# EAGLE board main_Dio Faziko Pratama(Line Follower) (EAGLE 9.6.2)
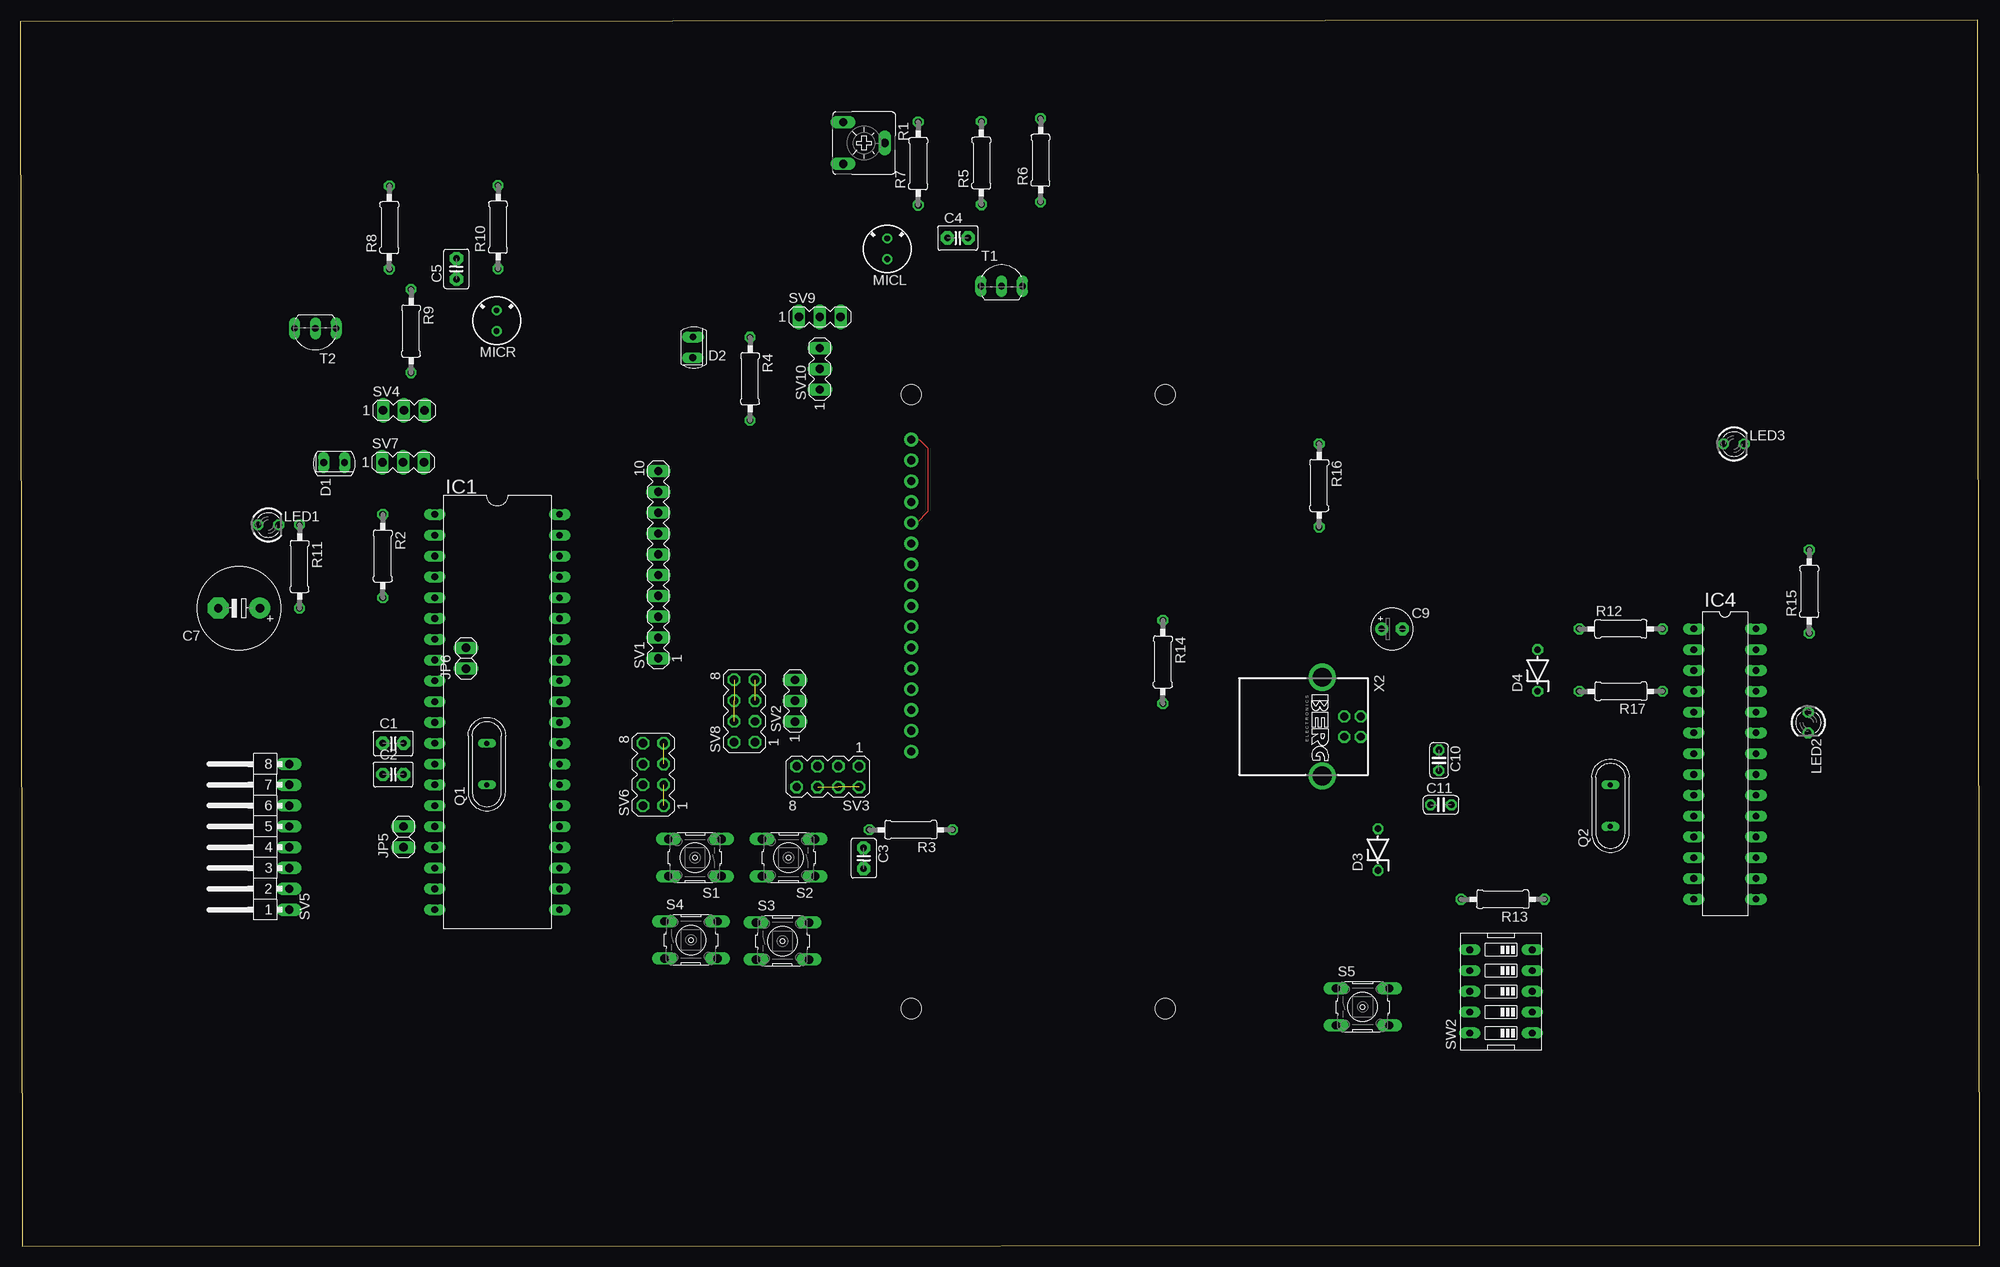
[diagram p0: board, top side]
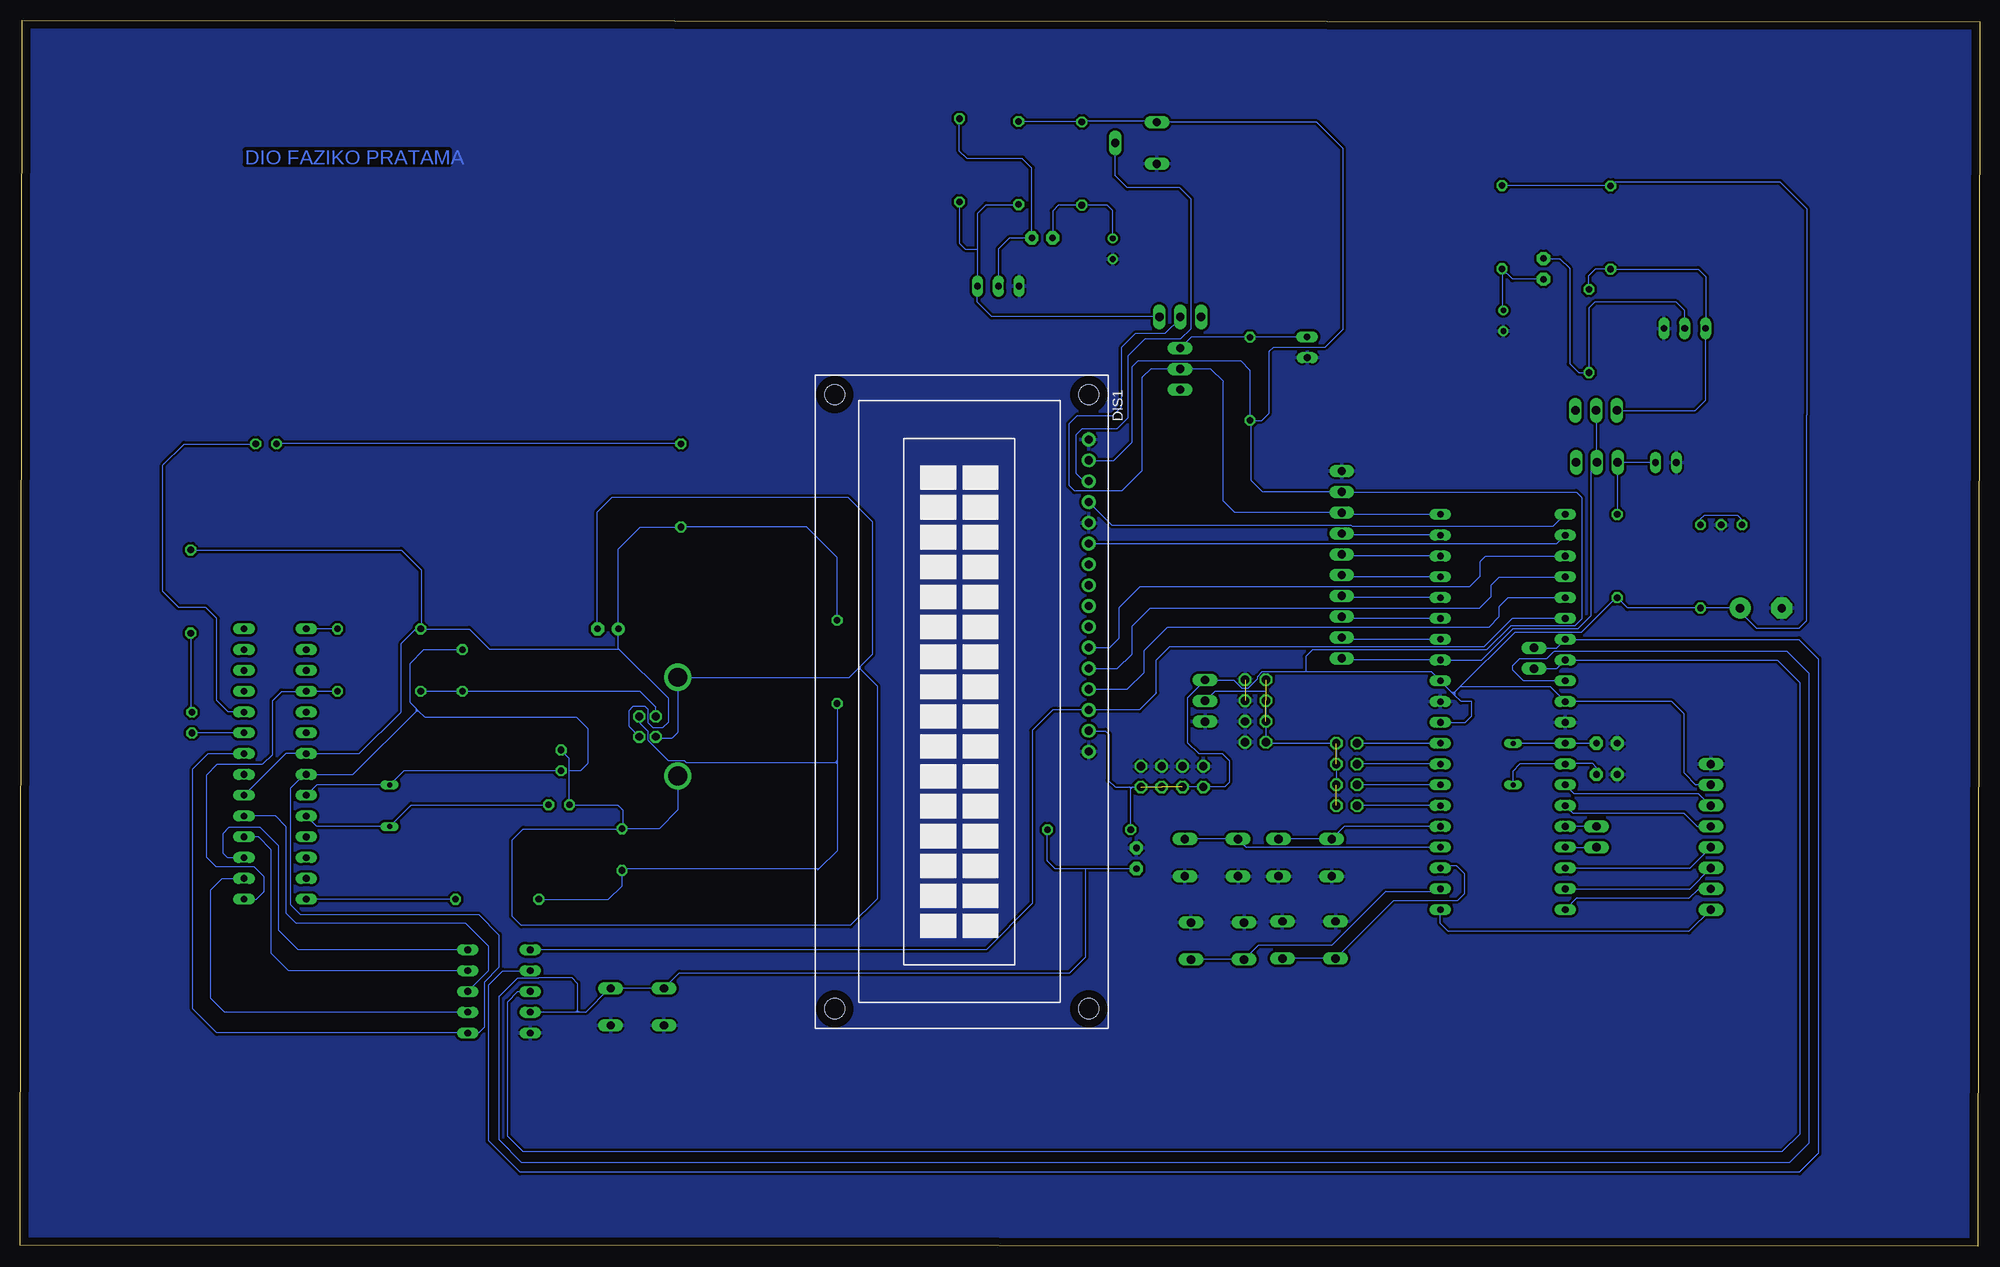
[diagram p1: board, bottom side, seen from below]

Size 239.14 x 149.71 mm. Coordinates in mm from the lower left corner, seen from the top.
Outline: 0.25,0 239.14,0.15 238.89,149.72 0,149.56 0.25,0
Copper layers (1*16): Top 0.035mm / dielectric 1.5mm / Bottom 0.035mm
Design rules "default": minimum track width 6mil, minimum drill 0.35mm, track to track 6mil, track to pad 6mil, pad to pad 6mil, via to via 6mil, smd to smd 6mil, copper to edge 40mil, drill to drill 6mil, minimum pad ring 10mil, minimum via ring 8mil, stop-mask expansion 4mil, vias tented up to drill 0mil, thermal gap 10mil

## Footprints (pad centres in the part's own frame; a part is rotated, then mirrored left to right if it is on the bottom)
C2.5-3 = drill 0.813 pad 1.6 octagon: 1 -1.27,0; 2 1.27,0
E5-10,5 = drill 1.016 pad 2.54: + -2.54,0 | drill 1.016 pad 2.54 octagon: - 2.54,0
E2,5-5 = drill 0.813 pad 1.6: + -1.27,0 | drill 0.813 pad 1.6 octagon: - 1.27,0
C025-024X044 = drill 0.813 octagon: 1 -1.27,0; 2 1.27,0
SFH225 = drill 0.813 long: A 0,1.27; K 0,-1.27
ZDIO-5 = drill 0.813 octagon: A 2.54,0; C -2.54,0
TUXGR_16X2_R2 = drill 1 pad 1.676: 1 -32,15.5; 2 -29.46,15.5; 3 -26.92,15.5; 4 -24.38,15.5; 5 -21.84,15.5; 6 -19.3,15.5; 7 -16.76,15.5; 8 -14.22,15.5; 9 -11.68,15.5; 10 -9.14,15.5; 11 -6.6,15.5; 12 -4.06,15.5; 13 -1.52,15.5; 14 1.02,15.5; 15 3.56,15.5; 16 6.1,15.5 | hole 2.5: -37.5,-15.5; 37.5,-15.5; -37.5,15.5; 37.5,15.5
DIL40 = drill 0.813 long: 1 -24.13,-7.62; 2 -21.59,-7.62; 3 -19.05,-7.62; 4 -16.51,-7.62; 5 -13.97,-7.62; 6 -11.43,-7.62; 7 -8.89,-7.62; 8 -6.35,-7.62; 9 -3.81,-7.62; 10 -1.27,-7.62; 11 1.27,-7.62; 12 3.81,-7.62; 13 6.35,-7.62; 14 8.89,-7.62; 15 11.43,-7.62; 16 13.97,-7.62; 17 16.51,-7.62; 18 19.05,-7.62; 19 21.59,-7.62; 20 24.13,-7.62; 21 24.13,7.62; 22 21.59,7.62; 23 19.05,7.62; 24 16.51,7.62; 25 13.97,7.62; 26 11.43,7.62; 27 8.89,7.62; 28 6.35,7.62; 29 3.81,7.62; 30 1.27,7.62; 31 -1.27,7.62; 32 -3.81,7.62; 33 -6.35,7.62; 34 -8.89,7.62; 35 -11.43,7.62; 36 -13.97,7.62; 37 -16.51,7.62; 38 -19.05,7.62; 39 -21.59,7.62; 40 -24.13,7.62
DIL28-3 = drill 0.813 long: 1 -16.51,-3.81; 2 -13.97,-3.81; 3 -11.43,-3.81; 4 -8.89,-3.81; 5 -6.35,-3.81; 6 -3.81,-3.81; 7 -1.27,-3.81; 8 1.27,-3.81; 9 3.81,-3.81; 10 6.35,-3.81; 11 8.89,-3.81; 12 11.43,-3.81; 13 13.97,-3.81; 14 16.51,-3.81; 15 16.51,3.81; 16 13.97,3.81; 17 11.43,3.81; 18 8.89,3.81; 19 6.35,3.81; 20 3.81,3.81; 21 1.27,3.81; 22 -1.27,3.81; 23 -3.81,3.81; 24 -6.35,3.81; 25 -8.89,3.81; 26 -11.43,3.81; 27 -13.97,3.81; 28 -16.51,3.81
1X02 = drill 1.016 long: 1 -1.27,0; 2 1.27,0
LED3MM = drill 0.813 octagon: A -1.27,0; K 1.27,0
F6050AP = drill 0.7 pad 1.2: 1 0,1.27; 2 0,-1.27
QS = drill 0.61 long: 1 -2.54,0; 2 2.54,0
CA6V = drill 1.016 long: A -2.54,-2.54; E 2.54,-2.54; S 0,2.54
0207/10 = drill 0.813 octagon: 1 -5.08,0; 2 5.08,0
B3F-10XX = drill 1.016 long: 1 -3.251,2.261; 2 3.251,2.261; 3 -3.251,-2.261; 4 3.251,-2.261
MA10-1 = drill 1.016 long: 1 -11.43,0; 2 -8.89,0; 3 -6.35,0; 4 -3.81,0; 5 -1.27,0; 6 1.27,0; 7 3.81,0; 8 6.35,0; 9 8.89,0; 10 11.43,0
MA03-1 = drill 1.016 long: 1 -2.54,0; 2 0,0; 3 2.54,0
MA04-2 = drill 1.016 octagon: 1 -3.81,-1.27; 2 -3.81,1.27; 3 -1.27,-1.27; 4 -1.27,1.27; 5 1.27,-1.27; 6 1.27,1.27; 7 3.81,-1.27; 8 3.81,1.27
MA08-1W = drill 1.016 long: 1 -8.89,0; 2 -6.35,0; 3 -3.81,0; 4 -1.27,0; 5 1.27,0; 6 3.81,0; 7 6.35,0; 8 8.89,0
EDG-05 = drill 0.813 long: 1 -5.08,-3.81; 2 -2.54,-3.81; 3 0,-3.81; 4 2.54,-3.81; 5 5.08,-3.81; 6 5.08,3.81; 7 2.54,3.81; 8 0,3.81; 9 -2.54,3.81; 10 -5.08,3.81
TO92-EBC = drill 0.813 long: B 0,-1.27; C 2.54,-1.27; E -2.54,-1.27
PN61729-S = drill 0.95 octagon: 1 1.25,4.71; 2 -1.25,4.71; 3 -1.25,2.71; 4 1.25,2.71 | drill 2.3 pad 2.9: S1 -6.02,0; S2 6.02,0

## Placement (x,y rotation side)
C1  22p  [C2.5-3]  45.5,61.45 0 top
C2  22p  [C2.5-3]  45.5,57.64 0 top
C3  10nF  [C2.5-3]  102.92,47.41 270 top
C4  100nF  [C2.5-3]  114.41,123.16 0 top
C5  100nF  [C2.5-3]  53.22,119.38 90 top
C7  1000uF/16V  [E5-10,5]  26.68,77.95 180 top
C9  10uF/16V  [E2,5-5]  167.42,75.42 0 top
C10  22pF  [C025-024X044]  173.15,59.36 270 top
C11  22pF  [C025-024X044]  173.4,53.93 0 top
D1  SFH225  [SFH225]  38.29,95.72 270 top
D2  SFH225  [SFH225]  82.07,109.81 359.9 top
D3  DZ3,6V  [ZDIO-5]  165.71,48.46 90 top
D4  DZ3,6V  [ZDIO-5]  185.2,70.34 90 top
DIS1  TUXGR_16X2_R2  [TUXGR_16X2_R2]  124.24,66.53 270 bottom
IC1  MEGA16-P  [DIL40]  58.2,65.26 270 top
IC4  MEGA8-P  [DIL28-3]  208.06,58.91 270 top
JP5  [1X02]  46.77,50.02 90 top
JP6  [1X02]  54.37,71.84 90 top
LED1  merah  [LED3MM]  30.26,88.12 0 top
LED2  Merah  [LED3MM]  218.22,63.97 270 top
LED3  hijau  [LED3MM]  209.15,98.01 0 top
MICL  MC  [F6050AP]  105.79,121.83 180 top
MICR  MC  [F6050AP]  58.12,113.05 180 top
Q1  8MHz  [QS]  56.93,58.91 90 top
Q2  12MHz  [QS]  194.09,53.83 90 top
R1  20K  [CA6V]  102.97,134.75 270 top
R2  56K  [0207/10]  44.23,84.31 270 top
R3  10K  [0207/10]  108.69,50.9 180 top
R4  56K  [0207/10]  89.06,105.96 270 top
R5  10K  [0207/10]  117.29,132.31 90 top
R6  100K  [0207/10]  124.52,132.64 90 top
R7  10K  [0207/10]  109.58,132.24 90 top
R8  10K  [0207/10]  45.03,124.44 90 top
R9  100K  [0207/10]  47.67,111.79 270 top
R10  10K  [0207/10]  58.29,124.48 90 top
R11  330  [0207/10]  34.07,83.04 270 top
R12  10K  [0207/10]  195.36,75.42 0 top
R13  68  [0207/10]  180.95,42.4 180 top
R14  2K2  [0207/10]  139.45,71.38 270 top
R15  330  [0207/10]  218.36,79.98 90 top
R16  330  [0207/10]  158.53,92.94 270 top
R17  68  [0207/10]  195.36,67.8 180 top
S1  [B3F-10XX]  82.33,47.48 180 top
S2  [B3F-10XX]  93.76,47.48 180 top
S3  [B3F-10XX]  93.02,37.3 0 top
S4  [B3F-10XX]  81.85,37.43 0 top
S5  [B3F-10XX]  163.84,29.25 0 top
SV1  [MA10-1]  77.85,83.26 90 top
SV2  [MA03-1]  94.53,66.63 90 top
SV3  [MA04-2]  98.56,57.38 180 top
SV4  [MA03-1]  46.8,102.1 0 top
SV5  [MA08-1W]  32.8,50.02 90 top
SV6  [MA04-2]  77.25,57.64 90 top
SV7  [MA03-1]  46.71,95.76 0 top
SV8  [MA04-2]  88.39,65.39 90 top
SV9  [MA03-1]  97.57,113.52 0 top
SV10  [MA03-1]  97.57,107.17 90 top
SW2  [EDG-05]  180.72,31.14 90 top
T1  [TO92-EBC]  119.77,118.54 0 top
T2  [TO92-EBC]  35.99,110.84 180 top
X2  PN61729-S  [PN61729-S]  158.89,63.49 270 top

## Library data of the parts
C1-C5 = capacitor-wima
C7 C9-C11 R2-R11 = rcl
D1 D2 = opto-trans-siemens; OC_FARNELL: unknown; OC_NEWARK: unknown
D3 D4 = diode
DIS1 = display-lcd; OC_FARNELL: unknown; OC_NEWARK: unknown
IC1 = atmel; MPN: ATMEGA16-16PU; OC_FARNELL: 9171142; OC_NEWARK: 01M6885
IC4 = atmel
JP5 JP6 = pinhead
LED1-LED3 = led
MICL MICR = microphon
Q1 Q2 SW2 = special
R1 = pot
R12-R17 = resistor
S1-S5 = switch-omron; MPN: B3F-1000; OC_FARNELL: 176432; OC_NEWARK: 36M3542
SV1-SV10 = con-lstb; OC_FARNELL: unknown; OC_NEWARK: unknown
T1 T2 = transistor
X2 = con-berg

## Nets
DGND: C9.- C10.1 C11.1 D3.A D4.A IC4.8 IC4.22 SW2.1 X2.4 X2.S1 X2.S2
GND: C1.1 C2.1 C3.1 C7.- D1.K D2.K DIS1.1 DIS1.5 DIS1.16 IC1.11 IC1.31 LED1.K MICL.1 MICR.1 R1.E S1.1 S1.2 S2.1 S2.2 S3.1 S3.2 S4.1 S4.2 S5.3 S5.4 SV1.10 SV2.1 SV3.1 SV3.3 SV3.5 SV3.7 SV5.8 SV8.1 SV8.3 SV8.5 SV8.7 SW2.10 T1.E T2.E
MISO: IC1.7 JP6.2 SW2.7
MOSI: DIS1.14 IC1.6 SW2.6
N$1: IC1.33 SV1.1 SV4.2 SV7.2
N$2: IC1.34 SV1.2
N$3: IC1.35 SV1.3
N$4: IC1.36 SV1.4
N$5: IC1.37 SV1.5
N$6: IC1.38 SV1.6
N$7: IC1.39 SV1.7
N$8: D2.A R4.1 SV10.3
N$9: IC1.24 S2.3 S2.4
N$10: DIS1.13 IC1.5
N$11: DIS1.12 IC1.4
N$12: DIS1.11 IC1.3
N$13: DIS1.6 IC1.2
N$14: R5.1 R6.1 SV9.3 T1.C
N$15: DIS1.3 R1.S
N$16: C1.2 IC1.12 Q1.2
N$17: C2.2 IC1.13 Q1.1
N$18: DIS1.4 IC1.1
N$19: D1.A R2.1 SV7.1
N$20: IC1.23 S4.3 S4.4
N$21: IC1.40 SV1.8 SV9.2 SV10.2
N$22: C4.2 R6.2 T1.B
N$23: C4.1 MICL.2 R7.1
N$24: R8.1 R9.1 SV4.1 T2.C
N$25: C5.2 R9.2 T2.B
N$26: C5.1 MICR.2 R10.1
N$27: IC1.22 S3.3 S3.4
N$28: IC1.25 S1.3 S1.4
N$30: IC1.21 SV5.1
N$32: IC1.20 SV5.2
N$33: IC1.19 SV5.3
N$34: IC1.18 SV5.4
N$35: IC1.15 SV5.5
N$36: IC1.14 SV5.6
N$37: IC1.16 JP5.2
N$38: IC1.17 JP5.1
N$41: LED1.A R11.1
N$42: IC4.1 R12.2
N$44: IC1.26 SV6.2
N$45: IC1.27 SV6.4
N$46: IC1.28 SV6.6
N$47: IC1.29 SV6.8
N$51: C10.2 IC4.9 Q2.2
N$52: C11.2 IC4.10 Q2.1
N$53: IC4.14 R13.1
N$55: LED2.A R15.1
N$56: LED3.A R16.1
N$57: IC4.23 LED2.K
N$58: IC4.24 LED3.K
N$59: D4.C R17.2 X2.3
N$67: IC4.4 IC4.15 R17.1
N$69: D3.C R13.2 R14.2 X2.2
N$175: IC4.17 SW2.5
N$176: IC4.18 SW2.4
N$177: IC4.19 SW2.3
N$178: IC4.16 SW2.2
RESET: C3.2 IC1.9 R3.1 S5.1 S5.2 SW2.9
SCK: IC1.8 JP6.1 SW2.8
VCC: C7.+ DIS1.2 DIS1.15 IC1.10 IC1.30 IC1.32 R1.A R2.2 R3.2 R4.2 R5.2 R7.2 R8.2 R10.2 R11.2 SV1.9 SV2.3 SV3.2 SV3.4 SV3.6 SV3.8 SV5.7
VDD: SV2.2 SV6.1 SV6.3 SV6.5 SV6.7 SV8.2 SV8.4 SV8.6 SV8.8
VPP: C9.+ IC4.7 IC4.20 R12.1 R14.1 R15.2 R16.2 X2.1

## Tracks (layer width: path | path; a pad name or v marks a point on that pad's centre or on a via)
DGND
  Bottom 0.152: IC4.22 211.89,60.2 216.19,60.2 218.09,58.3 218.09,29.01 215.15,26.06 SW2.1 183.21,26.06 182.53,26.74 182.53,32.28 180.73,34.08 180.73,38.06 183.21,40.55 204.96,40.55 206.21,41.79 206.21,55.91 204.47,57.64 IC4.8 198.57,57.64 190.85,65.36 | 137.01,70.47 136.8,70.69 | 136.8,70.69 136.58,70.9 | 136.58,70.9 135.11,72.38 135.11,88.45 138.09,91.43 166.93,91.43 168.77,89.59 168.77,75.51 C9.- | 190.51,65.36 189.75,64.6 171.23,64.6 169.88,63.26 169.88,59.01 170.8,58.09 172.13,58.09 | 190.51,65.36 190.68,65.53 | 190.68,65.53 190.85,65.7 | 190.85,65.7 191.58,66.43 191.58,71.19 189.89,72.88 D4.A | X2.S2 158.89,53.3 161.19,51 D3.A | X2.4 161.42,62.05 159.62,62.05 158.89,62.77 X2.S1 137.98,69.51 137.06,70.43 137.01,70.47 | 136.8,70.69 136.58,70.47 | 136.58,70.47 134.55,68.44 134.55,42.47 137.83,39.19 177.99,39.19 179.12,40.31 179.12,49.62 177.74,51 D3.A | D3.A 165.6,51.11 165.6,53.3 166.23,53.93 C11.1 172.13,58.09 | 172.13,58.09 172.13,59.61 C10.1 | 190.85,65.36 190.68,65.53 | 190.51,65.36 190.85,65.36 | 190.85,65.36 190.85,65.7 | 136.58,70.47 136.58,70.9 | 136.58,70.47 137.01,70.47
GND  (1 unrouted)
  Top 0.152: DIS1.1 109.73,98.53 110.78,97.48 110.78,89.72 109.43,88.37 DIS1.5
  pour Bottom (isolate 0.305): -0.02,149.95 -0.02,0.39 239.17,0.39 239.17,149.95
MISO
  Bottom 0.152: JP6.2 51.62,73.11 IC1.7 22.05,74.15 19.66,71.76 19.66,11.37 21.99,9.04 178.14,9.04 181.98,12.88 181.98,31.96 180.25,33.68 SW2.7
MOSI
  Bottom 0.152: IC1.6 57.05,76.69 60.52,73.22 98.89,73.22 100.47,71.65 100.47,67.59 102.55,65.51 DIS1.14 113.13,65.51 115.63,63.01 115.63,41.87 121.28,36.22 SW2.6
N$1
  Bottom 0.152: SV1.1 77.64,71.61 IC1.33 60.77,71.61 56.94,75.44 48.99,75.44 47.4,77.03 47.4,95.08 SV7.2 46.71,102.02 SV4.2
N$2
  Bottom 0.152: IC1.34 77.64,74.15 SV1.2
N$3
  Bottom 0.152: IC1.35 77.64,76.69 SV1.3
N$4
  Bottom 0.152: IC1.36 77.64,79.23 SV1.4
N$5
  Bottom 0.152: IC1.37 77.64,81.77 SV1.5
N$6
  Bottom 0.152: IC1.38 77.64,84.31 SV1.6
N$7
  Bottom 0.152: IC1.39 77.64,86.85 SV1.7
N$8
  Bottom 0.152: D2.A 89.02,111.08 R4.1 96.24,111.04 SV10.3
N$9
  Bottom 0.152: IC1.24 89.52,48.75 S2.4 S2.3
N$10
  Bottom 0.152: DIS1.13 104.02,68.05 101.99,70.09 101.99,72.78 99.1,75.68 59.84,75.68 58.61,76.91 58.61,78.15 57.53,79.23 IC1.5
N$11
  Bottom 0.152: DIS1.12 105.24,70.59 103.45,72.38 103.45,75.75 101.22,77.98 61.01,77.98 59.61,79.38 59.61,80.8 58.63,81.77 IC1.4
N$12
  Bottom 0.152: DIS1.11 106.17,73.13 105,74.3 105,78.05 102.45,80.6 62.23,80.6 60.93,81.9 | 61.13,81.69 60.93,81.89 60.93,81.9 | 60.93,81.9 60.93,83.63 60.25,84.31 IC1.3
N$13
  Bottom 0.152: DIS1.6 51.6,85.83 IC1.2
N$14
  Bottom 0.152: SV9.3 120.55,113.52 122.35,115.32 122.35,117.23 T1.C 122.31,121.81 | 122.31,121.81 122.31,126.18 121.25,127.23 R5.1 | R5.1 | R6.1 124.52,122.54 123.78,121.81 122.31,121.81
N$15
  Bottom 0.152: DIS1.3 109.33,93.45 110.24,94.36 110.24,99.16 110.1,99.3 110.01,99.39 109.52,99.88 105.24,99.88 103.91,101.21 103.91,108.79 101.85,110.85 97.5,110.85 96.25,112.1 96.25,127.92 97.6,129.27 104.03,129.27 105.51,130.75 R1.S
N$16
  Bottom 0.152: IC1.12 50.77,61.45 | C1.2 IC1.12 | IC1.12 Q1.2
N$17
  Bottom 0.152: Q1.1 56.97,56.41 56.97,58.04 56.1,58.91 IC1.13 50.53,58.96 47.24,58.96 46.77,58.49 C2.2
N$18
  Bottom 0.152: IC1.1 52.08,87.89 76.51,87.89 76.68,88.06 105.88,88.06 DIS1.4
N$19
  Bottom 0.152: D1.A 44.13,95.72 SV7.1 44.23,95.71 R2.1
N$20
  Bottom 0.152: IC1.23 65.57,46.46 63.79,46.46 62.86,45.52 62.86,43.14 63.72,42.28 71.49,42.28 S4.3 S4.4
N$21
  Bottom 0.152: IC1.40 77.64,89.39 SV1.8 90.91,89.61 92.31,91 92.31,105.55 92.26,105.6 93.83,107.17 SV10.2 101.15,107.17 102.24,106.08 102.24,94.7 104.72,92.22 110.46,92.22 111.13,92.9 111.13,99.98 111.13,100.13 111.13,100.48 110.13,101.48 105.79,101.48 104.7,102.56 104.7,109.81 103,111.52 99.37,111.52 97.57,113.32 SV9.2
N$22
  Bottom 0.152: T1.B 119.78,117.28 119.78,121.79 118.41,123.16 C4.2 115.68,131.68 116.85,132.85 123.59,132.85 124.52,133.77 R6.2
N$23
  Bottom 0.152: MICL.2 105.79,126.48 106.49,127.18 109.57,127.18 R7.1 112.44,127.16 113.16,126.45 113.16,123.17 C4.1
N$24
  Bottom 0.152: SV4.1 34.69,102.1 33.45,103.34 T2.C 33.41,112.15 33.41,118.43 34.34,119.36 R8.1 46.89,119.36 47.79,118.46 47.79,116.99 R9.1
N$25
  Bottom 0.152: T2.B 35.99,113.86 | 36.02,113.88 35.99,113.86 | C5.2 51.24,120.65 50.03,119.44 50.03,107.8 48.94,106.71 R9.2 47.68,106.72 47.68,114.6 46.96,115.32 37.02,115.32 35.99,114.28 35.99,113.86
N$26
  Bottom 0.152: C5.1 57,118.11 R10.1 58.28,119.39 58.28,114.48 MICR.2
N$27
  Bottom 0.152: IC1.22 66.14,43.35 72.48,43.35 79.02,36.81 88,36.81 S3.3 S3.4
N$28
  Bottom 0.152: IC1.25 77.53,51.29 S1.4 S1.3
N$30
  Bottom 0.152: SV5.1 35.47,38.46 64.85,38.46 65.82,39.43 IC1.21
N$32
  Bottom 0.152: SV5.2 34.3,43.67 35.42,42.55 49.16,42.55 IC1.20
N$33
  Bottom 0.152: IC1.19 35.34,43.67 SV5.3
N$34
  Bottom 0.152: IC1.18 35.34,46.21 SV5.4
N$35
  Bottom 0.152: IC1.15 49.68,52.93 36.09,52.93 34.45,51.29 SV5.5
N$36
  Bottom 0.152: IC1.14 49.55,55.35 34.31,55.35 SV5.6
N$37
  Bottom 0.152: JP5.2 IC1.16
N$38
  Bottom 0.152: IC1.17 JP5.1
N$41
  Bottom 0.152: LED1.A 28.99,88.69 29.54,89.24 33.63,89.24 34.13,88.74 34.13,88.18 R11.1
N$42
  Bottom 0.152: R12.2 IC4.1
N$44
  Bottom 0.152: IC1.26 SV6.2
N$45
  Bottom 0.152: IC1.27 SV6.4
N$46
  Bottom 0.152: IC1.28 SV6.6
N$47
  Bottom 0.152: IC1.29 SV6.8
N$51
  Bottom 0.152: C10.2 192.37,58.09 Q2.2 202.98,56.37 IC4.9
N$52
  Bottom 0.152: IC4.10 202.98,51.29 Q2.1 191.45,53.93 C11.2
N$53
  Bottom 0.152: R13.1 IC4.14
N$55
  Bottom 0.152: R15.1 218.36,65.38 LED2.A
N$56
  Bottom 0.152: R16.1 207.87,98.02 LED3.A
N$57
  Bottom 0.152: IC4.23 218.2,62.72 LED2.K
N$58
  Bottom 0.152: IC4.24 213.76,65.26 215.16,66.66 215.16,76.67 216.53,78.04 219.82,78.04 221.75,79.97 221.75,95.41 219.15,98.01 LED3.K
N$59
  Bottom 0.152: X2.3 161.6,65.91 163.5,67.8 D4.C R17.2
N$67
  Bottom 0.152: IC4.15 210.35,42.4 209.4,43.35 209.4,45.12 210.6,46.32 215.22,46.32 216.43,47.53 216.43,57.61 215.13,58.9 209.54,58.9 208.36,60.08 208.36,66.69 207.25,67.8 204.5,67.8 IC4.4 R17.1
N$69
  Bottom 0.152: R13.2 167.36,42.4 165.71,44.05 D3.C 165.54,46.09 141.69,46.09 | R14.2 139.45,59.38 | 139.45,59.38 139.45,59.12 | 139.45,59.12 139.45,58.93 | 139.45,58.93 139.45,48.32 141.69,46.09 | 141.69,46.09 141.85,45.92 | X2.2 163.6,63.98 162.56,62.94 162.56,61.84 160.08,59.35 158.11,59.35 157.88,59.12 139.64,59.12 | 139.64,59.12 139.45,59.12 | 139.45,58.93 139.64,59.12 | 139.45,59.38 139.64,59.19 139.64,59.12
N$175
  Bottom 0.152: SW2.5 205.22,36.22 207.6,38.61 207.6,48.91 209.85,51.15 213.7,51.15 214.45,50.41 214.45,48.06 213.87,47.48 IC4.17
N$176
  Bottom 0.152: SW2.4 206.38,33.68 208.5,35.81 208.5,48.46 210.06,50.02 IC4.18
N$177
  Bottom 0.152: SW2.3 181.96,33.71 181.96,36.66 184.76,39.46 205.5,39.46 206.7,40.66 206.7,51.25 208.01,52.56 IC4.19
N$178
  Bottom 0.152: SW2.2 214.19,28.6 215.89,30.31 215.89,43.56 214.51,44.94 IC4.16
RESET
  Bottom 0.152: C3.2 109.13,46.14 | 109.13,46.14 112.83,46.14 113.77,47.08 R3.1 | 170.91,28.6 170.15,28.6 167.24,31.52 S5.2 S5.1 158.7,33.41 158.7,33.43 111.04,33.43 109.13,35.34 109.13,46.14 | 170.91,28.6 171.15,28.6 | 171.15,28.6 171.38,28.6 | SW2.9 171.52,28.6 171.38,28.6 | IC1.9 55.66,69.07 56.96,70.37 56.96,70.95 56.11,71.8 52.8,71.8 52.08,72.52 52.08,72.54 51.88,72.74 23.53,72.74 20.85,70.06 20.85,12.61 23.22,10.23 177.94,10.23 180.71,13 180.71,30.54 | 180.71,30.54 180.71,30.61 | 180.71,30.54 178.46,32.8 175.88,32.8 175.83,32.85 171.87,32.85 171.15,32.13 171.15,28.84 | 171.15,28.84 171.15,28.6 | 170.91,28.6 171.15,28.84 | 171.15,28.84 171.38,28.6
SCK
  Bottom 0.152: JP6.1 51.62,70.57 IC1.8 24.69,71.61 21.95,68.88 21.95,13.72 24.12,11.56 177.76,11.56 179.68,13.48 179.68,29.89 178.43,31.14 SW2.8
VCC  (2 unrouted)
  Bottom 0.152: 64.04,67.3 63.28,66.53 61.98,66.53 61.98,64.79 62.77,63.99 IC1.30 | 64.04,67.3 64.24,67.49 | 64.24,67.49 64.4,67.65 | 64.4,67.65 IC1.32 66.94,70.19 82.26,70.19 | SV5.7 34.63,56.37 36.07,57.81 36.07,65.04 37.57,66.53 IC1.10 52.35,68.3 63.43,68.3 | 64.24,67.49 64.07,67.65 | 63.43,68.3 64.04,67.68 | 63.43,68.3 56.67,75.06 48.53,75.06 44.35,79.23 R2.2 42.96,77.96 R11.2 34.06,77.95 C7.+ 29.22,77.5 27.24,75.51 22.02,75.51 21.12,76.41 21.12,101.55 21.12,101.54 21.12,126.76 24.34,129.99 44.56,129.99 R8.2 58.25,129.52 R10.2 | 103.08,56.11 103.56,56.11 103.61,56.05 103.61,55.92 | 103.08,56.11 SV3.2 SV3.8 92.13,56.11 91.59,56.65 91.59,59.33 92.44,60.18 95.32,60.18 96.7,61.56 96.7,67 SV2.3 91.03,69.17 90.07,68.21 89.25,68.21 88.11,69.35 88.11,69.61 87.53,70.19 82.26,70.19 | DIS1.15 106.69,62.97 106.29,62.57 106.29,56.97 106.33,56.93 105.49,56.1 103.79,56.1 | 103.79,56.1 103.38,56.1 | 103.38,56.1 103.09,56.1 103.08,56.11 | R3.2 103.61,55.86 | DIS1.2 105.66,95.99 103.4,98.25 103.4,107.45 102.69,108.16 96.4,108.16 96.38,108.15 90.16,108.15 89.06,107.05 R4.2 | R4.2 88.91,100.73 88.91,93.55 87.51,92.15 SV1.9 49.23,92.15 48.53,91.45 48.53,76.63 49.39,75.78 57.25,75.78 60.2,72.82 81.47,72.82 82.26,72.03 82.26,70.19 | R4.2 87.62,100.88 86.72,101.78 86.72,109.31 86.18,109.85 79.87,109.85 77.67,112.05 77.67,134.05 80.91,137.29 R1.A 100.53,137.39 109.65,137.39 | R5.2 109.65,137.39 | 109.65,137.39 R7.2 | 103.38,56.1 103.61,55.86 | 103.61,55.86 103.61,55.92 | 103.61,55.92 103.79,56.1 | 64.04,67.68 64.04,67.3 | 64.04,67.68 64.07,67.65 | 64.07,67.65 64.4,67.65
VDD  (4 unrouted)
  Bottom 0.152: SV6.7 SV6.3 | SV8.8 87.12,67.86 | 87.12,67.86 87.12,61.74 | 87.12,61.74 SV8.2 | SV6.7 78.52,61.9 | SV6.7 86.83,61.45 87.12,61.74 | SV2.2 93.3,67.86 87.12,67.86
VPP
  Bottom 0.152: X2.1 164.85,63.48 164.85,65.48 164.31,66.02 162.96,66.02 162.57,65.62 162.57,63.96 161.98,63.37 160.71,63.37 160.02,64.05 160.02,66.9 166.1,72.98 | 166.1,72.98 166.15,73.03 C9.+ 166.15,85.18 163.47,87.86 R16.2 143.17,87.86 139.45,84.15 R14.1 | 190.2,75.42 R12.1 190.89,75.42 192.66,73.66 192.66,65.29 197.76,60.18 IC4.7 206.79,60.18 IC4.20 | 190.2,75.42 184.36,75.42 181.92,72.98 166.1,72.98 | R15.2 192.68,85.06 190.2,82.58 190.2,75.42

## Text on the board
Bottom: DIO FAZIKO PRATAMA